# Altium PCB Main_2022-10-17.pcbdoc (part 2 of 2)
Units mil, origin at the board's own origin, x right, y up, seen from the top; angles counter-clockwise.
Board outline 1653.5 x 1653.5 mil, 4 copper layers (Top Layer, Mid-Layer 1, Mid-Layer 2, Bottom Layer); 65 components, 57 nets, 222 pads, 194 vias.
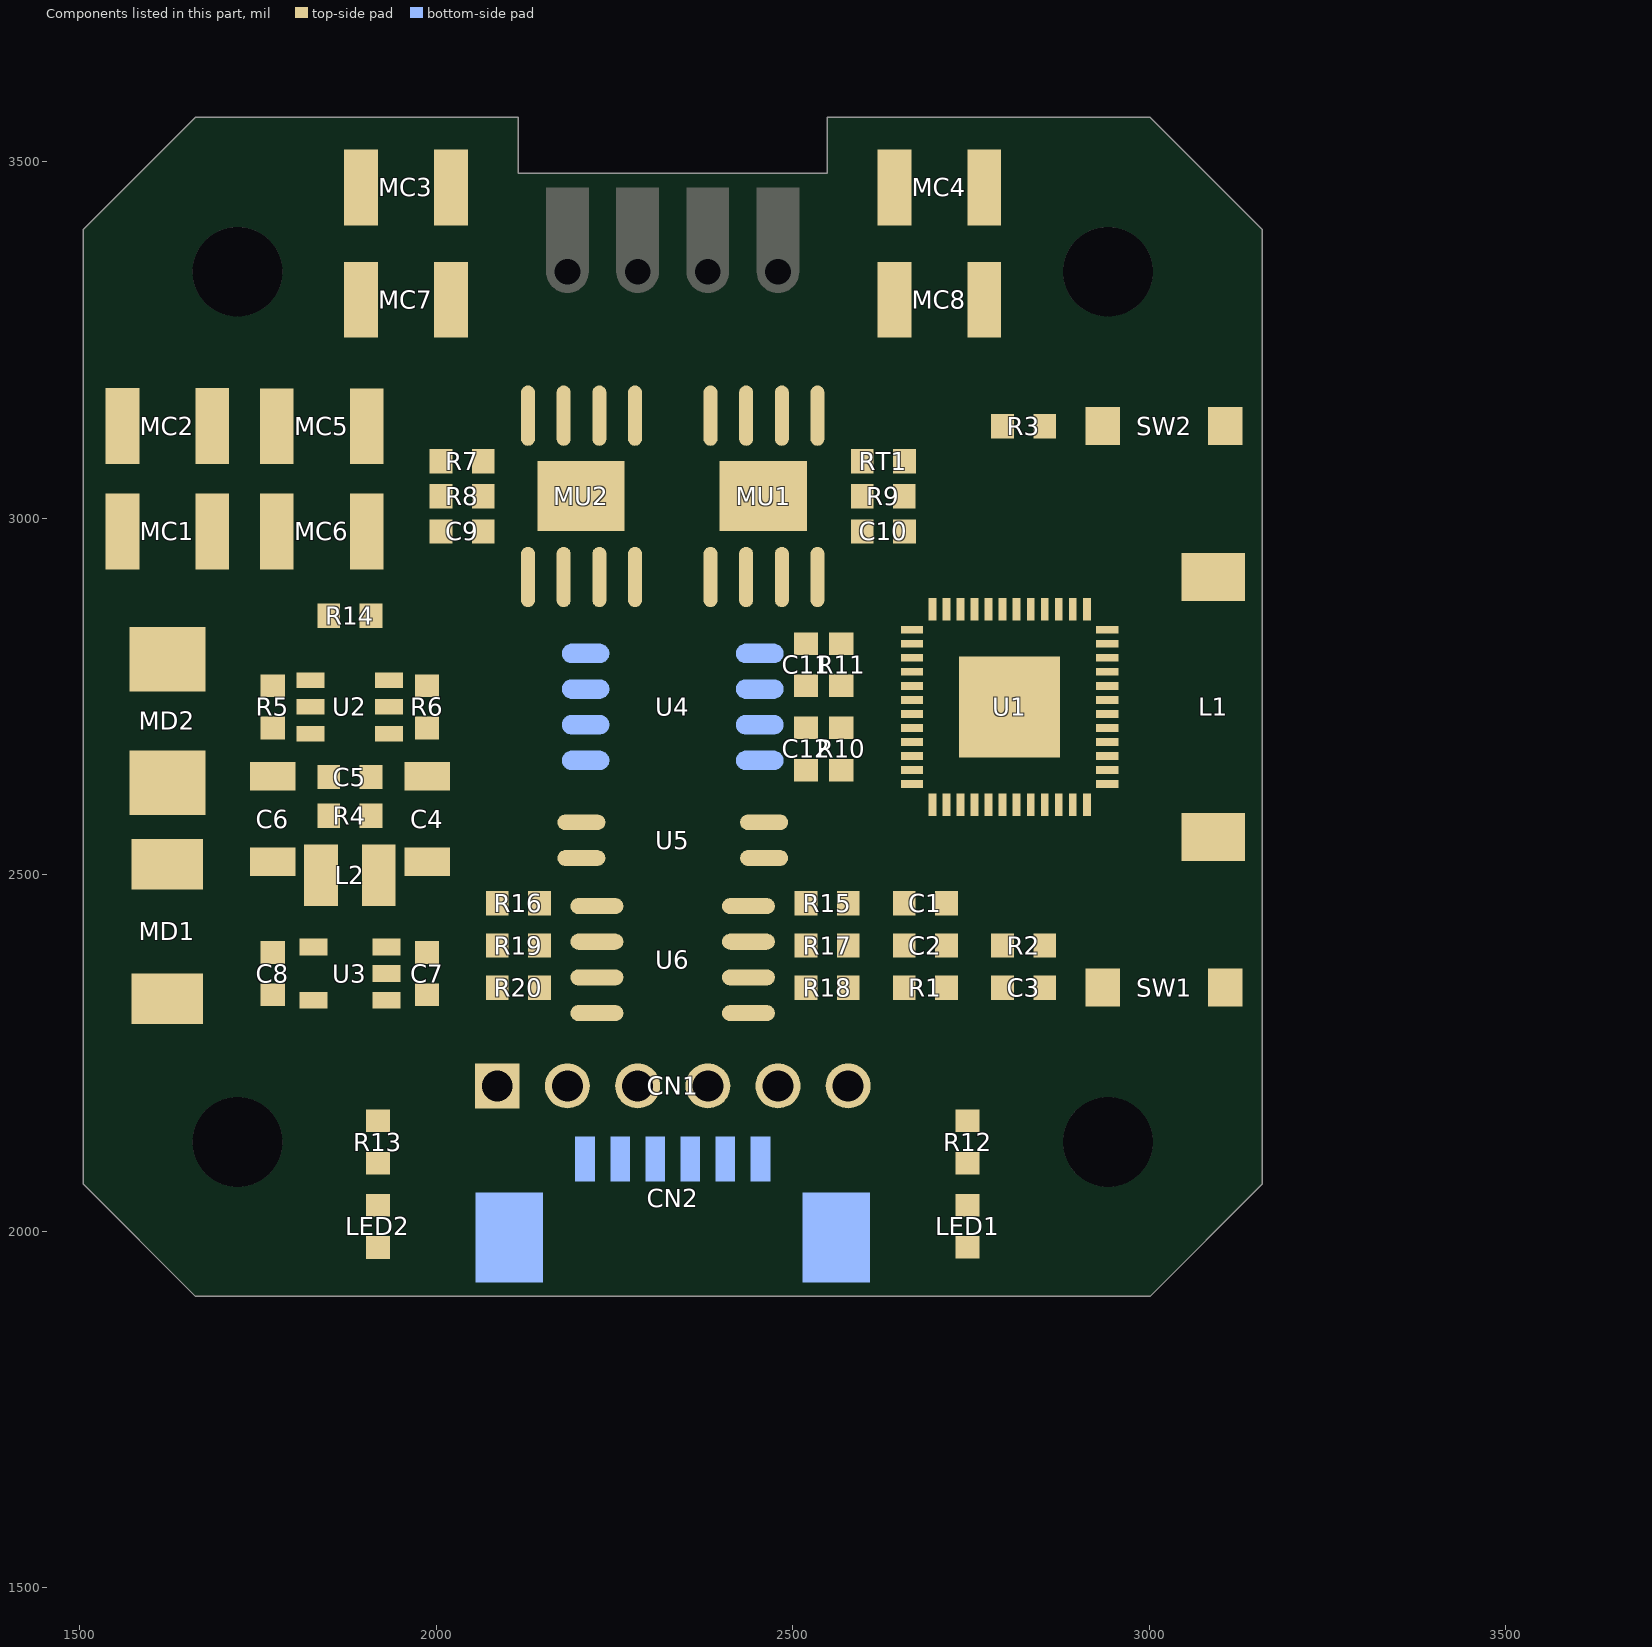
[diagram p4: the components of this part, seen from the top]

## Other copper
Top Layer:
  pour cut-out net L1_2: 3237.26,3011.09 3197.89,3011.09 3197.89,3089.83 3001.04,3089.83 3001.04,2381.17 3197.89,2381.17 3197.89,2971.72 3237.26,2971.72
  region net OUT4: 2464.62,3104.59 2469.54,3099.67 2499.07,3099.67 2503.99,3104.59 2503.99,3203.02 2489.23,3217.78 2489.23,3306.37 2508.91,3326.05 2508.91,3385.11 2449.86,3385.11 2449.86,3380.18 2449.86,3326.05 2449.86,3207.94 2464.62,3193.18
  region net MR1_2: 2454.78,3104.59 2449.86,3099.67 2420.33,3099.67 2415.41,3104.59 2415.41,3178.41 2376.04,3217.78 2376.04,3276.84 2380.96,3281.76 2415.41,3281.76 2420.33,3276.84 2420.33,3257.15 2420.33,3222.7 2454.78,3188.26
  region net OUT3: 2405.57,3104.59 2400.64,3099.67 2371.12,3099.67 2366.2,3104.59 2366.2,3139.04 2351.43,3153.81 2321.9,3188.26 2321.9,3301.45 2351.43,3330.97 2351.43,3385.11 2410.49,3385.11 2410.49,3330.97 2361.28,3281.76 2361.28,3217.78 2405.57,3173.49 2405.57,3143.97
  region net OUT2: 2243.16,3099.67 2248.09,3104.59 2248.09,3203.02 2233.32,3217.78 2233.32,3281.76 2248.09,3296.52 2277.61,3296.52 2312.06,3330.97 2312.06,3385.11 2253.01,3385.11 2253.01,3350.66 2193.95,3291.6 2193.95,3207.94 2208.72,3193.18 2208.72,3104.59 2213.64,3099.67
  region net MU2_7: 2198.89,3104.58 2193.97,3099.66 2164.44,3099.66 2159.52,3104.58 2159.52,3178.4 2120.15,3217.77 2120.15,3276.83 2125.07,3281.75 2159.52,3281.75 2164.44,3276.83 2164.44,3257.14 2164.44,3222.7 2198.89,3188.25
  region net OUT1: 2110.29,3104.59 2115.21,3099.67 2144.74,3099.67 2149.66,3104.59 2149.66,3173.49 2105.37,3217.78 2105.37,3281.76 2125.05,3301.45 2184.11,3301.45 2213.64,3330.97 2213.64,3385.11 2154.58,3385.11 2154.58,3355.58 2134.9,3335.89 2100.45,3335.89 2066,3301.45 2066,3183.34 2110.29,3139.04
  region net PGND: 2243.16,3276.84 2253.01,3286.68 2297.3,3286.68 2307.14,3276.84 2307.14,3217.78 2297.3,3207.94 2253.01,3207.94 2243.16,3217.78
  region net PGND: 2499.05,3276.84 2508.9,3286.68 2553.19,3286.68 2563.03,3276.84 2563.03,3217.78 2553.19,3207.94 2508.9,3207.94 2499.05,3217.78
  region net VM_IN: 1554.19,2292.59 1573.87,2272.9 1672.3,2272.9 1691.98,2292.59 1691.98,2381.17 1672.3,2400.85 1573.87,2400.85 1554.19,2381.17
  region net VM: 1691.98,2666.6 1672.3,2686.29 1573.87,2686.29 1554.19,2666.6 1554.2,2459.91 1573.88,2440.22 1672.31,2440.22 1691.99,2459.91
  region net VM: 1642.77,3198.1 1623.09,3178.41 1623.09,2932.35 1642.77,2912.66 1790.41,2912.66 1810.09,2932.35 1810.09,3178.41 1790.41,3198.1
  region net PGND: 1950.84,2932.35 1931.16,2912.66 1877.02,2912.66 1857.34,2932.35 1857.34,3178.41 1877.02,3198.1 1931.16,3198.1 1950.84,3178.41
  region net PGND: 1942.97,3257.15 1923.29,3237.47 1869.15,3237.47 1849.47,3257.15 1849.47,3503.21 1869.15,3522.9 1923.29,3522.9 1942.97,3503.21
  region net VM: 1962.65,3503.22 1982.34,3522.9 2036.47,3522.9 2056.16,3503.22 2056.16,3257.15 2036.47,3237.47 1982.34,3237.47 1962.65,3257.15
  region net PGND: 2710.68,3503.22 2730.37,3522.9 2784.5,3522.9 2804.19,3503.22 2804.19,3257.15 2784.5,3237.47 2730.37,3237.47 2710.68,3257.15
  region net VM: 2691,3257.15 2671.32,3237.47 2617.18,3237.47 2597.5,3257.15 2597.5,3503.21 2617.18,3522.9 2671.32,3522.9 2691,3503.21
  region net VM: 2321.9,3089.83 2302.22,3070.15 2282.53,3070.15 2277.61,3075.07 2277.61,3084.91 2262.85,3099.67 2262.85,3178.41 2272.69,3188.26 2302.22,3188.26 2321.9,3168.57
  region net VM: 2563.05,3075.07 2572.89,3084.91 2572.89,3114.44 2577.81,3119.36 2577.81,3178.41 2567.97,3188.26 2528.6,3188.26 2518.76,3178.41 2513.83,3173.49 2513.83,3099.67 2523.68,3089.83 2538.44,3075.07
  region net PGND: 1524.66,2745.34 1504.97,2765.03 1504.97,3178.41 1524.66,3198.1 1583.71,3198.1 1603.4,3178.41 1603.4,2917.59 1628.01,2892.98 1672.3,2892.98 1691.98,2873.3 1691.98,2765.03 1672.3,2745.34
  region net DIR-: 2546.36,2202.04 2579.82,2235.39 2549.65,2236.45 2545.4,2232.21
  region net CLK-: 2447.93,2202.05 2481.41,2235.39 2451.24,2236.46 2446.99,2232.23
  region net EN-: 2349.51,2202.06 2383,2235.39 2352.83,2236.47 2348.58,2232.24
  region net 3.3V: 2723.15,2318.83 2708.15,2318.93 2705.86,2325.95 2725.54,2325.82
  region net VM_IN: 1672.44,2375.61 1661.85,2386.23 1668.57,2389.4 1675.63,2382.32
  region net 3.3V_ESP: 2919.09,2693.77 2919.06,2678.77 2926.06,2681.26 2926.09,2691.26
  region net 3.3V_ESP: 2919.1,2674.08 2919.05,2659.08 2926.06,2661.56 2926.09,2671.56
  region net 3.3V_ESP: 2902.75,2647.58 2892.18,2636.94 2898.91,2633.78 2905.95,2640.87
  region net 3.3V_ESP: 2865.6,2620.64 2880.6,2620.64 2878.1,2613.64 2868.1,2613.64
  region net 3.3V_ESP: 2821.52,2620.6 2806.52,2620.63 2809,2613.63 2819,2613.6
  region net 3.3V_ESP: 2706.37,2627.08 2695.79,2637.72 2692.59,2631.01 2699.64,2623.92
  region net 3.3V_ESP: 2801.87,2850.35 2786.87,2850.41 2789.4,2857.4 2799.4,2857.36
  region net GND: 2742.8,2850.38 2727.8,2850.39 2730.3,2857.38 2740.3,2857.38
  region net GND: 2747.5,2850.37 2762.5,2850.37 2760,2857.37 2750,2857.37
  region net GND: 1925.88,1944.85 1910.88,1944.89 1913.4,1951.89 1923.4,1951.86
  region net ESP_UART0_RXD: 2317.12,2036.1 2306.49,2025.52 2314.62,2023.73 2318.87,2027.96
  region net ESP_UART0_TXD: 2267.61,2033 2254.24,2026.2 2261.28,2021.93 2266.91,2024.79
  region net GND: 2737.6,1944.87 2752.6,1944.87 2748.1,1951.87 2742.1,1951.87
  region net COM: 2285.78,2298.67 2285.76,2313.67 2278.76,2311.16 2278.77,2301.16
  region net COM: 2285.78,2448.67 2285.76,2463.67 2278.76,2461.16 2278.77,2451.16
  region net COM: 2285.79,2565.98 2285.74,2580.98 2278.75,2578.46 2278.78,2568.46
  region net 3.3V: 2610.59,2393.36 2610.59,2408.36 2603.59,2403.86 2603.59,2397.86
  region net 3.3V: 2610.59,2334.26 2610.59,2349.26 2603.59,2344.76 2603.59,2338.76
  region net 3.3V: 2610.59,2452.36 2610.59,2467.36 2603.59,2462.86 2603.59,2456.86
  region net 3.3V: 2377.75,2463.67 2377.72,2448.67 2384.73,2451.16 2384.74,2461.16
  region net GND: 2723.22,2482.81 2708.22,2482.84 2710.7,2475.83 2720.7,2475.81
  region net GND: 2801.87,2318.85 2786.87,2318.91 2789.4,2325.9 2799.4,2325.86
  region net 3.3V: 2801.87,2423.79 2786.87,2423.74 2789.4,2416.75 2799.4,2416.78
  region net ESP_RST: 2366.34,1967.17 2355.71,1977.76 2363.84,1979.54 2368.09,1975.31
  region net 3.3V: 2536.77,2654.44 2536.72,2639.44 2529.73,2641.96 2529.76,2651.96
  region net C11_2: 2550.07,2772.44 2549.88,2757.44 2556.91,2759.86 2557.03,2769.86
  region net C11_2: 2536.84,2757.44 2536.65,2772.44 2529.68,2769.86 2529.81,2759.86
  region net GND: 2469.68,2844.39 2459.07,2833.79 2465.78,2830.6 2472.86,2837.67
  region net GND: 2418,2837.16 2403,2837.15 2405.5,2830.15 2415.5,2830.16
  region net VM: 2014.3,3112.74 1999.3,3112.75 2001.8,3105.75 2011.8,3105.74
  region net GND: 2076.47,2863.59 2065.86,2852.99 2062.68,2859.71 2069.76,2866.77
  region net GND: 2069.24,2816.57 2069.21,2831.57 2062.22,2829.06 2062.23,2819.06
  region net PGND: 1856.97,2830.71 1841.97,2830.63 1844.43,2837.65 1854.43,2837.7
  region net GND: 2377.75,2313.67 2377.72,2298.67 2384.73,2301.16 2384.74,2311.16
  region net GND: 2377.76,2530.98 2377.71,2515.98 2384.72,2518.46 2384.75,2528.46
  region net 3.3V: 2723.11,2938.97 2708.11,2938.96 2710.6,2945.96 2720.6,2945.97
  region net GND: 2664.07,2938.94 2649.07,2938.99 2651.6,2945.98 2661.6,2945.94
  region net GND: 3114.27,2309.01 3099.27,2309.07 3101.8,2316.06 3111.8,2316.02
  region net MOSI: 2171.07,2667.98 2171.02,2652.98 2178.04,2657.46 2178.05,2663.46
  region net MISO: 2157.84,2702.98 2157.8,2717.98 2150.81,2713.46 2150.83,2707.46
  region net SCK: 2171.22,2767.84 2170.87,2752.85 2177.97,2757.18 2178.11,2763.18
  region net GND: 2136.31,2870.07 2121.31,2870.06 2123.8,2877.06 2133.8,2877.06
  region net DAC2: 2527.2,2870.06 2542.2,2870.06 2537.7,2877.06 2531.7,2877.06
  region net IN4: 2477.2,2870.06 2492.2,2870.06 2487.7,2877.06 2481.7,2877.06
  region net IN3: 2427.2,2870.06 2442.2,2870.06 2437.7,2877.06 2431.7,2877.06
  region net GND: 2377.2,2870.06 2392.2,2870.06 2387.7,2877.06 2381.7,2877.06
  region net DAC1: 2286.31,2870.07 2271.31,2870.06 2275.8,2877.06 2281.8,2877.06
  region net IN2: 2236.31,2870.07 2221.31,2870.06 2225.8,2877.06 2231.8,2877.06
  region net IN1: 2186.31,2870.07 2171.31,2870.06 2175.8,2877.06 2181.8,2877.06
  region net DAC2: 2880.6,2896.21 2865.6,2896.2 2870.1,2889.2 2876.1,2889.2
  region net DAC1: 2900.29,2925.75 2885.29,2925.72 2889.8,2918.73 2895.8,2918.74
  region net IN2: 2742.8,2574.79 2727.8,2574.8 2732.3,2581.79 2738.3,2581.79
  region net IN1: 2801.87,2574.77 2786.87,2574.82 2791.4,2581.8 2797.4,2581.78
  region net IN4: 2623.81,2757.54 2623.78,2772.54 2630.79,2768.06 2630.8,2762.06
  region net IN3: 2643.54,2792.24 2643.49,2777.24 2650.5,2781.71 2650.52,2787.71
  region net VBUS_S: 2899.39,2713.46 2899.38,2698.46 2906.38,2702.96 2906.39,2708.96
  region net FET_TEMP: 2919.09,2757.54 2919.06,2772.54 2926.07,2768.06 2926.08,2762.06
  region net ESP_RST: 2964.91,2777.24 2964.86,2792.24 2957.87,2787.71 2957.89,2781.71
  region net ESP_RST: 2860.92,2423.77 2845.92,2423.72 2850.45,2416.73 2856.45,2416.75
  region net FET_TEMP: 2590,2919.27 2605,2919.27 2600.5,2926.27 2594.5,2926.27
  region net ENIN: 2821.52,2830.71 2806.52,2830.67 2811,2837.68 2817,2837.7
  region net DIRIN: 2841.21,2850.39 2826.21,2850.37 2830.7,2857.38 2836.7,2857.38
  region net CLKIN: 2845.9,2830.67 2860.9,2830.67 2856.4,2837.67 2850.4,2837.67
  region net VBUS_S: 2073.51,2938.96 2058.51,2938.99 2063.03,2945.98 2069.03,2945.97
  region net GND: 2988.88,2909.41 2973.88,2909.45 2976.4,2916.45 2986.4,2916.42
  region net LED: 2752.61,2177.69 2737.62,2177.72 2742.11,2170.71 2748.09,2170.7
  region net ENIN: 2512.35,2580.77 2511.95,2565.77 2505.07,2570.46 2505.23,2576.45
  region net ENIN: 2526.18,2566.4 2511.18,2566.57 2515.61,2559.52 2521.59,2559.45
  region net DIRIN: 2575.2,2566.44 2590.2,2566.44 2585.69,2559.44 2579.71,2559.44
  region net CLKIN: 2377.76,2398.3 2377.67,2413.3 2384.7,2408.83 2384.73,2402.85
  region net DIRIN: 2377.76,2364.02 2377.67,2349.02 2384.7,2353.48 2384.73,2359.47
  region net DIRIN: 2590.22,2505.91 2575.22,2505.87 2579.71,2512.88 2585.69,2512.9
  region net CLKIN: 2604.8,2566.44 2619.8,2566.44 2615.29,2559.44 2609.31,2559.44
  region net CLKIN: 2619.78,2505.87 2604.78,2505.91 2609.31,2512.9 2615.29,2512.88
  region net ESP_BOOT: 2745.73,2922.38 2735.12,2932.98 2733.35,2924.85 2737.59,2920.61
  region net ESP_BOOT: 2737.6,2938.97 2752.6,2938.97 2748.1,2945.97 2742.1,2945.97
  region net LED: 2706.39,2676.58 2695.79,2665.97 2694.02,2674.1 2698.25,2678.34
  region net CSQ: 2624.69,2728.89 2609.69,2728.87 2614.2,2721.88 2620.2,2721.89
  region net 3.3V_ESP: 2672.26,2442.95 2640.51,2442.95 2646.4,2412.95 2666.4,2412.95
  region net 3.3V_ESP: 2640.51,2476.96 2672.26,2476.96 2666.4,2506.96 2646.4,2506.96
  region net GND: 2728.2,2442.95 2703.2,2442.95 2710.7,2427.95 2720.7,2427.95
  region net GND: 2703.2,2476.96 2728.2,2476.96 2720.7,2489.46 2710.7,2489.46
  region net 3.3V_ESP: 2640.51,2417.87 2672.26,2417.87 2666.4,2447.87 2646.4,2447.87
  region net 3.3V_ESP: 2672.26,2383.85 2640.51,2383.85 2646.4,2353.85 2666.4,2353.85
  region net GND: 2703.2,2417.87 2728.2,2417.87 2720.7,2432.87 2710.7,2432.87
  region net GND: 2806.9,2324.75 2781.9,2324.75 2789.4,2312.26 2799.4,2312.26
  region net ESP_RST: 2846,2358.77 2861,2358.77 2856.5,2367.77 2850.5,2367.77
  region net ESP_RST: 2869.37,2349.26 2869.37,2334.26 2878.37,2338.76 2878.37,2344.76
  region net GND: 2019.29,2658.06 2019.29,2618.06 2036.3,2627.06 2036.5,2647.06
  region net GND: 1974.8,2658.06 1999.8,2658.06 1992.3,2673.06 1982.3,2673.06
  region net 5V: 1955.29,2499.31 1955.29,2536.81 1938.2,2525.56 1938.2,2510.56
  region net 5V: 2006.05,2498.06 1968.55,2498.06 1979.8,2475.56 1994.8,2475.56
  region net U2_6: 1833.51,2654.06 1865.26,2654.06 1856.8,2672.66 1841.8,2672.66
  region net U2_6: 1856.83,2620.05 1833.51,2649.41 1825.26,2623.62 1834.65,2611.8
  region net U2_1: 1896.1,2654.06 1921.1,2654.06 1913.6,2669.06 1903.6,2669.06
  region net GND: 1994.3,2998.57 2019.3,2998.57 2011.8,3013.57 2001.8,3013.57
  region net GND: 2019.3,2964.55 1994.3,2964.55 2001.8,2949.55 2011.8,2949.55
  region net VBUS_S: 2073.57,2964.55 2058.57,2964.55 2063.05,2955.55 2069.05,2955.55
  region net VBUS_S: 2053.6,2998.57 2078.6,2998.57 2071.1,3013.57 2061.1,3013.57
  region net GND: 2644.1,2998.57 2669.1,2998.57 2661.6,3013.57 2651.6,3013.57
  region net GND: 2669.1,2964.55 2644.1,2964.55 2651.6,2949.55 2661.6,2949.55
  region net FET_TEMP: 2605,2964.55 2590,2964.55 2594.5,2955.55 2600.5,2955.55
  region net FET_TEMP: 2584.9,2998.57 2609.9,2998.57 2602.4,3013.57 2592.4,3013.57
  region net U2_6: 1814.9,2542.57 1844.64,2542.57 1820.71,2558.36 1804.8,2553.05
  region net 5V: 1943.1,2536.81 1943.1,2499.31 1965.6,2510.56 1965.6,2525.56
  region net 5V: 1900.75,2542.57 1938.25,2542.57 1927,2565.07 1912,2565.07
  region net R13_2: 1930.9,2052.66 1905.9,2052.66 1913.4,2067.66 1923.4,2067.66
  region net GND: 1930.9,1961.6 1905.9,1961.6 1913.4,1946.6 1923.4,1946.6
  region net 3.3V: 2731.63,2324.75 2699.88,2324.75 2705.86,2312.36 2725.54,2312.36
  region net 3.3V_ESP: 2640.57,2358.77 2672.32,2358.77 2666.4,2388.77 2646.4,2388.77
  region net 3.3V: 2781.9,2417.87 2806.9,2417.87 2799.4,2430.36 2789.4,2430.36
  region net ESP_RST: 2845.94,2417.87 2860.94,2417.87 2856.41,2426.87 2850.41,2426.87
  region net ESP_RST: 2861,2383.85 2846,2383.85 2850.5,2374.85 2856.5,2374.85
  region net 3.3V: 2778.37,3116.66 2778.37,3141.66 2763.37,3134.16 2763.37,3124.16
  region net ESP_BOOT: 2869.43,3136.66 2869.43,3121.66 2878.43,3126.16 2878.43,3132.16
  region net ESP_BOOT: 2845.04,3112.15 2837.68,3125.22 2833.82,3113.72 2836.88,3108.29
  region net U2_3: 1850.55,2599.96 1865.22,2579.72 1870.91,2597.44 1864.97,2605.63
  region net VM_IN: 1783.2,2689.93 1758.2,2689.93 1765.7,2674.93 1775.7,2674.93
  region net VM_IN: 1767.44,2721.68 1787.71,2707.04 1793.41,2721.43 1785.19,2727.36
  region net U2_4: 1787.71,2777.66 1787.71,2752.66 1802.71,2760.16 1802.71,2770.16
  region net U2_3: 1970.29,2752.66 1970.29,2777.66 1955.29,2770.16 1955.29,2760.16
  region net GND: 1999.8,2689.93 1974.8,2689.93 1982.3,2674.93 1992.3,2674.93
  region net GND: 1970.29,2707.05 1990.57,2721.68 1972.81,2727.36 1964.59,2721.43
  region net VM: 1994.3,3096.96 2019.3,3096.96 2011.8,3111.96 2001.8,3111.96
  region net VBUS_S: 2078.6,3062.95 2053.6,3062.95 2061.1,3047.95 2071.1,3047.95
  region net VBUS_S: 2053.6,3047.77 2078.6,3047.77 2071.1,3062.77 2061.1,3062.77
  region net VBUS_S: 2078.6,3013.75 2053.6,3013.75 2061.1,2998.75 2071.1,2998.75
  region net GND: 2019.3,3013.75 1994.3,3013.75 2001.8,2998.75 2011.8,2998.75
  region net FET_TEMP: 2584.9,3047.77 2609.9,3047.77 2602.4,3062.77 2592.4,3062.77
  region net FET_TEMP: 2609.9,3013.75 2584.9,3013.75 2592.4,2998.75 2602.4,2998.75
  region net GND: 2669.1,3013.75 2644.1,3013.75 2651.6,2998.75 2661.6,2998.75
  region net PGND: 1861.89,2846.45 1836.89,2846.45 1844.46,2831.45 1854.46,2831.45
  region net GND: 1924.53,2866.59 1909.72,2846.45 1924.18,2840.8 1930.18,2848.95
  region net 3.3V: 2593.83,2467.36 2593.83,2452.36 2602.83,2456.86 2602.83,2462.86
  region net ENIN: 2511.12,2476.96 2526.08,2476.96 2521.59,2485.94 2515.61,2485.94
  region net R16_1: 2137.4,2476.96 2152.4,2476.96 2147.9,2485.96 2141.9,2485.96
  region net EN-: 2077.62,2442.95 2069.67,2455.66 2066.02,2444.52 2069.29,2439.3
  region net 3.3V: 2593.83,2408.36 2593.83,2393.36 2602.83,2397.86 2602.83,2403.86
  region net CLKIN: 2502.77,2398.66 2502.77,2413.66 2493.77,2409.16 2493.77,2403.16
  region net 3.3V: 2593.83,2349.26 2593.83,2334.26 2602.83,2338.76 2602.83,2344.76
  region net U6_2: 2160.73,2413.66 2160.73,2398.66 2169.73,2403.16 2169.73,2409.16
  region net CLK-: 2069.67,2393.36 2069.67,2408.36 2067.1,2403.86 2067.1,2397.86
  region net DIR-: 2093.1,2324.75 2078.1,2324.75 2082.6,2315.75 2088.6,2315.75
  region net 3.3V_ESP: 2925.36,2621.67 2925.36,2632.7 2912.5,2632.26 2912.5,2622.26
  region net U1_2: 2956.85,2652.39 2956.85,2641.36 2971.5,2641.96 2971.5,2651.96
  region net 3.3V_ESP: 2925.36,2661.04 2925.36,2672.07 2912.5,2671.56 2912.5,2661.56
  region net 3.3V_ESP: 2925.36,2680.73 2925.36,2691.76 2912.5,2691.26 2912.5,2681.26
  region net VBUS_S: 2925.36,2700.41 2925.36,2711.44 2916.36,2708.96 2916.36,2702.96
  region net FET_TEMP: 2925.36,2759.47 2925.36,2770.5 2916.36,2768.06 2916.36,2762.06
  region net ESP_RST: 2956.85,2790.18 2956.85,2779.15 2965.85,2781.74 2965.85,2787.74
  region net DAC1: 2887.27,2888.11 2898.29,2888.11 2895.8,2897.11 2889.8,2897.11
  region net DAC2: 2867.59,2888.11 2878.61,2888.11 2876.1,2897.11 2870.1,2897.11
  region net CLKIN: 2858.92,2856.62 2847.9,2856.62 2850.4,2847.62 2856.4,2847.62
  region net DIRIN: 2839.24,2856.62 2828.22,2856.62 2830.7,2847.62 2836.7,2847.62
  region net ENIN: 2819.55,2856.62 2808.53,2856.62 2811,2847.62 2817,2847.62
  region net 3.3V_ESP: 2799.87,2856.62 2788.85,2856.62 2789.4,2843.76 2799.4,2843.76
  region net GND: 2760.5,2856.62 2749.48,2856.62 2750,2843.76 2760,2843.76
  region net GND: 2740.81,2856.62 2729.79,2856.62 2730.3,2843.76 2740.3,2843.76
  region net ESP_BOOT: 2710.11,2888.11 2721.13,2888.11 2718.6,2897.11 2712.6,2897.11
  region net LED: 2701.44,2856.62 2690.42,2856.62 2692.91,2847.64 2698.89,2847.64
  region net IN3: 2651.55,2779.15 2651.55,2790.18 2642.55,2787.74 2642.55,2781.74
  region net IN4: 2651.55,2759.47 2651.55,2770.5 2642.55,2768.06 2642.55,2762.06
  region net CSQ: 2651.55,2661.04 2651.55,2672.07 2642.55,2669.56 2642.55,2663.56
  region net SCK: 2651.55,2641.36 2651.55,2652.39 2642.55,2649.96 2642.55,2643.96
  region net MOSI: 2651.55,2621.67 2651.55,2632.7 2642.55,2630.26 2642.55,2624.26
  region net 3.3V_ESP: 2690.42,2614.3 2701.44,2614.3 2700.9,2627.26 2690.9,2627.26
  region net MISO: 2721.13,2582.8 2710.11,2582.8 2712.6,2573.8 2718.6,2573.8
  region net IN2: 2740.81,2582.8 2729.79,2582.8 2732.3,2573.8 2738.3,2573.8
  region net ESP_UART0_RXD: 2760.5,2582.8 2749.48,2582.8 2752,2573.8 2758,2573.8
  region net ESP_UART0_TXD: 2780.18,2582.8 2769.16,2582.8 2771.7,2573.8 2777.7,2573.8
  region net IN1: 2799.87,2582.8 2788.85,2582.8 2791.4,2573.8 2797.4,2573.8
  region net 3.3V_ESP: 2808.53,2614.3 2819.55,2614.3 2819,2627.26 2809,2627.26
  region net 3.3V_ESP: 2867.59,2614.3 2878.61,2614.3 2878.1,2627.26 2868.1,2627.26
  region net R12_2: 2752.6,2052.69 2737.6,2052.69 2742.1,2061.69 2748.1,2061.69
  region net GND: 2752.6,1961.63 2737.6,1961.63 2742.1,1952.63 2748.1,1952.63
  region net GND: 2535.76,2836.76 2535.76,2811.76 2550.76,2819.26 2550.76,2829.26
  region net GND: 2501.75,2811.76 2501.75,2836.76 2486.75,2829.26 2486.75,2819.26
  region net C11_2: 2535.76,2777.36 2535.76,2752.36 2550.76,2759.86 2550.76,2769.86
  region net GND: 2501.75,2693.56 2501.75,2718.56 2486.75,2711.06 2486.75,2701.06
  region net 3.3V: 2535.76,2659.46 2535.76,2634.46 2543.4,2641.96 2543.4,2651.96
  region net LED: 2737.62,2170.8 2752.58,2170.8 2748.09,2179.77 2742.11,2179.77
  region net R12_2: 2752.6,2079.73 2737.6,2079.73 2742.1,2070.73 2748.1,2070.73
  region net 3.3V: 1935.37,2167.46 1935.37,2142.46 1950.37,2149.96 1950.37,2159.96
  region net R13_2: 1930.9,2079.73 1905.9,2079.73 1913.4,2064.73 1923.4,2064.73
  region net FET_TEMP: 2609.9,3062.98 2584.9,3062.98 2592.4,3047.98 2602.4,3047.98
  region net 3.3V: 2672.55,3092.46 2672.55,3067.46 2687.55,3074.96 2687.55,3084.96
  region net U2_3: 1914.43,2762.07 1914.43,2783.73 1899.43,2777.86 1899.43,2767.86
  region net GND: 1953.79,2746.33 1953.79,2724.67 1957.6,2730.46 1957.6,2740.46
  region net U2_1: 1935.77,2687.27 1914.43,2687.27 1905.07,2676.2 1915.69,2672.66
  region net U2_6: 1843.55,2690.6 1806.2,2687.27 1839.56,2671.79 1854.6,2677.96
  region net VM_IN: 1804.18,2724.67 1804.18,2746.33 1800.4,2740.46 1800.4,2730.46
  region net 5V: 1910.49,2387.07 1910.49,2410.69 1896.7,2406.36 1896.7,2391.36
  region net 5V: 1949.86,2410.69 1949.86,2387.07 1972.36,2391.36 1972.36,2406.36
  region net GND: 1949.86,2373.3 1949.86,2349.67 1957.6,2351.46 1957.6,2371.46
  region net 5V: 1910.49,2312.27 1910.49,2335.9 1896.7,2331.56 1896.7,2316.56
  region net U1_2: 3044.98,2565.76 3044.98,2540.76 3029.98,2548.26 3029.98,2558.26
  region net GND: 3119.3,2315.03 3094.3,2315.03 3101.8,2302.46 3111.8,2302.46
  region net ESP_RST: 2927.2,2315.03 2942.2,2315.03 2937.7,2306.03 2931.7,2306.03
  region net ESP_RST: 2910.49,2349.26 2910.49,2334.26 2901.49,2338.76 2901.49,2344.76
  region net GND: 3082.53,3116.66 3082.53,3141.66 3067.53,3134.16 3067.53,3124.16
  region net ESP_BOOT: 2910.49,3136.66 2910.49,3121.66 2901.49,3126.16 2901.49,3132.16
  region net GND: 1795.7,2498.06 1745.7,2498.06 1760.7,2468.06 1780.7,2468.06
  region net VM_IN: 1758.2,2658.06 1783.2,2658.06 1775.7,2673.06 1765.7,2673.06
  region net VM_IN: 1751.6,2618.06 1738.69,2639.47 1732.5,2620.68 1737.82,2611.86
  region net GND: 2004.24,2315.93 1970.23,2315.93 1977.3,2302.46 1997.3,2302.46
  region net GND: 1970.23,2315.93 2004.24,2347.68 1973.35,2359.88 1958.72,2346.22
  region net 5V: 1970.23,2406.99 2004.24,2406.99 1994.8,2429.49 1979.8,2429.49
  region net 5V: 1970.23,2380.11 1970.23,2406.99 1947.73,2406.36 1947.73,2391.36
  region net GND: 1753.73,2375.24 1753.73,2406.99 1741.2,2401.06 1741.23,2381.06
  region net GND: 1753.73,2406.99 1787.74,2406.99 1780.7,2436.99 1760.7,2436.99
  region net 3.3V: 1787.74,2347.68 1787.74,2315.93 1817.74,2321.86 1817.74,2341.86
  region net 3.3V: 1787.74,2315.93 1753.73,2315.93 1760.7,2285.93 1780.7,2285.93
  region net C11_2: 2560.52,2721.99 2575.48,2721.99 2570.99,2730.96 2565.01,2730.96
  region net C11_2: 2550.99,2752.36 2550.99,2777.36 2535.99,2769.86 2535.99,2759.86
  region net C11_2: 2575.48,2749.03 2560.52,2749.03 2565.01,2740.05 2570.99,2740.05
  region net GND: 2550.99,2811.76 2550.99,2836.76 2535.99,2829.26 2535.99,2819.26
  region net COM: 2226.27,2584.55 2226.17,2562.5 2241.19,2568.46 2241.24,2578.46
  region net R16_1: 2172.89,2515.99 2172.83,2530.99 2163.85,2526.46 2163.88,2520.46
  region net ENIN: 2490.65,2580.97 2490.58,2566.01 2499.58,2570.46 2499.6,2576.45
  region net GND: 2437.29,2512.5 2437.19,2534.55 2422.22,2528.46 2422.26,2518.46
  region net COM: 2251.31,2444.86 2251.31,2467.46 2266.31,2461.16 2266.31,2451.16
  region net U6_2: 2191.12,2398.66 2191.12,2413.66 2182.12,2409.16 2182.12,2403.16
  region net U6_3: 2191.12,2348.66 2191.12,2363.66 2182.12,2359.16 2182.12,2353.16
  region net COM: 2251.31,2294.86 2251.31,2317.46 2266.31,2311.16 2266.31,2301.16
  region net 3.3V: 2412.09,2444.86 2412.09,2467.46 2397.09,2461.16 2397.09,2451.16
  region net CLKIN: 2472.28,2398.66 2472.28,2413.66 2481.28,2409.16 2481.28,2403.16
  region net CLKIN: 2403.74,2398.55 2403.52,2413.51 2394.61,2408.89 2394.7,2402.91
  region net DIRIN: 2472.28,2348.66 2472.28,2363.66 2481.28,2359.16 2481.28,2353.16
  region net DIRIN: 2403.74,2363.76 2403.52,2348.8 2394.61,2353.42 2394.7,2359.41
  region net GND: 2412.09,2294.86 2412.09,2317.46 2397.09,2311.16 2397.09,2301.16
  region net GND: 2392.2,2878.74 2377.2,2878.74 2381.7,2869.74 2387.7,2869.74
  region net IN3: 2442.2,2878.74 2427.2,2878.74 2431.7,2869.74 2437.7,2869.74
  region net IN4: 2492.2,2878.74 2477.2,2878.74 2481.7,2869.74 2487.7,2869.74
  region net DAC2: 2542.2,2878.74 2527.2,2878.74 2531.7,2869.74 2537.7,2869.74
  region net GND: 2138.65,2885.1 2118.97,2885.11 2123.8,2870.11 2133.8,2870.1
  region net IN1: 2186.31,2878.73 2171.31,2878.74 2175.8,2869.73 2181.8,2869.73
  region net IN2: 2236.31,2878.73 2221.31,2878.74 2225.8,2869.73 2231.8,2869.73
  region net DAC1: 2286.31,2878.73 2271.31,2878.74 2275.8,2869.73 2281.8,2869.73
Mid-Layer 1:
  pour cut-out: 3001.04,3089.83 3197.89,3089.83 3237.26,3089.83 3237.26,3050.46 3197.89,3050.46 3197.89,2381.17 3001.04,2381.17
  region net 3.3V: 2716.24,2922.37 2705.63,2932.98 2702.45,2926.26 2709.52,2919.19
Mid-Layer 2:
  pour cut-out: 3237.26,3050.46 3197.89,3050.46 3197.89,3089.83 3001.04,3089.83 3001.04,2381.17 3158.52,2381.17 3197.89,2381.17 3197.89,3011.09 3237.26,3011.09
Bottom Layer:
  pour cut-out: 3237.26,2971.72 3197.89,2971.72 3197.89,3089.83 3001.04,3089.83 3001.04,2381.17 3197.89,2381.17 3197.89,2932.35 3237.26,2932.35
  region net COM: 2264.32,2229.66 2310.3,2218.8 2297.38,2244.51 2287.38,2246.87
  region net ESP_UART0_RXD: 2314.62,2042.13 2299.62,2042.09 2304.1,2049.1 2310.1,2049.12
  region net ESP_UART0_TXD: 2265.42,2042.13 2250.42,2042.1 2254.9,2049.11 2260.9,2049.12
  region net COM: 2299.88,2312.79 2284.88,2312.79 2287.38,2319.79 2297.38,2319.79
  region net COM: 2299.88,2299.56 2284.88,2299.56 2287.38,2292.56 2297.38,2292.56
  region net COM: 2299.88,2462.79 2284.88,2462.79 2287.38,2469.79 2297.38,2469.79
  region net COM: 2299.88,2449.56 2284.88,2449.56 2287.38,2442.56 2297.38,2442.56
  region net COM: 2299.88,2566.88 2284.88,2566.88 2287.38,2559.88 2297.38,2559.88
  region net GND: 2109.9,2069.43 2094.9,2069.44 2097.4,2062.44 2107.4,2062.43
  region net GND: 2568.6,2069.44 2553.6,2069.43 2556.1,2062.43 2566.1,2062.44
  region net GND: 2462.29,2053.12 2447.29,2053.14 2449.8,2060.14 2459.8,2060.12
  region net 3.3V: 2216.21,2043.3 2201.21,2043.28 2203.7,2050.28 2213.7,2050.3
  region net ESP_RST: 2363.88,1974.37 2348.88,1974.41 2353.4,1981.4 2359.4,1981.38
  region net 3.3V: 2543.99,2656.9 2533.38,2646.3 2530.2,2653.02 2537.27,2660.08
  region net C11_2: 2539.64,2755.74 2534.61,2769.87 2528.75,2765.46 2532.31,2755.46
  region net MOSI: 2171.07,2667.98 2171.02,2652.98 2178.04,2657.46 2178.05,2663.46
  region net MISO: 2171.07,2717.98 2171.02,2702.98 2178.04,2707.46 2178.05,2713.46
  region net SCK: 2171.07,2767.98 2171.02,2752.98 2178.04,2757.46 2178.05,2763.46
  region net GND: 2171.07,2817.98 2171.02,2802.98 2178.03,2805.46 2178.06,2815.46
  region net DAC2: 2541.32,2855.95 2541.31,2870.95 2548.31,2866.45 2548.31,2860.45
  region net IN4: 2477.2,2856.83 2492.2,2856.83 2487.7,2849.83 2481.7,2849.83
  region net IN3: 2444.68,2862.83 2434.07,2873.43 2442.2,2875.2 2446.44,2870.96
  region net DAC1: 2288.79,2862.82 2278.19,2873.43 2286.32,2875.19 2290.56,2870.95
  region net IN2: 2238.79,2864.07 2228.18,2853.47 2236.32,2851.7 2240.56,2855.94
  region net IN1: 2188.79,2864.07 2178.18,2853.47 2186.32,2851.7 2190.56,2855.94
  region net DAC2: 2873.72,2892.84 2863.11,2903.44 2861.34,2895.31 2865.58,2891.07
  region net DAC1: 2886.16,2939.85 2886.15,2924.85 2879.15,2929.36 2879.16,2935.36
  region net IN2: 2735.93,2558.2 2725.31,2568.79 2723.55,2560.65 2727.8,2556.42
  region net IN1: 2795.01,2558.2 2784.37,2568.77 2782.63,2560.63 2786.89,2556.4
  region net IN4: 2624.69,2771.63 2609.69,2771.65 2614.2,2778.64 2620.2,2778.64
  region net IN3: 2629.4,2791.37 2644.4,2791.37 2639.9,2798.37 2633.9,2798.37
  region net VBUS_S: 2902.75,2705.33 2892.15,2715.95 2900.28,2717.71 2904.52,2713.46
  region net FET_TEMP: 2919.98,2771.62 2904.98,2771.66 2909.5,2778.65 2915.5,2778.63
  region net ESP_RST: 2964,2778.14 2979,2778.14 2974.5,2771.14 2968.5,2771.14
  region net ESP_RST: 2845.9,2436.97 2860.9,2436.97 2856.4,2443.97 2850.4,2443.97
  region net FET_TEMP: 2607.48,2913.28 2596.87,2902.68 2605.01,2900.91 2609.25,2905.15
  region net ENIN: 2807.42,2816.57 2807.41,2831.57 2800.42,2827.07 2800.42,2821.09
  region net DIRIN: 2841.21,2837.14 2826.21,2837.16 2830.71,2830.16 2836.69,2830.15
  region net CLKIN: 2859.02,2815.78 2844.49,2819.52 2846.65,2811.73 2853.38,2810.01
  region net VBUS_S: 2072.62,2924.86 2072.62,2939.86 2079.62,2935.36 2079.62,2929.36
  region net LED: 2751.74,2176.82 2751.74,2191.82 2758.74,2187.31 2758.74,2181.32
  region net ENIN: 2525.4,2580.58 2525.35,2565.58 2532.37,2570.07 2532.38,2576.05
  region net DIRIN: 2575.2,2579.67 2590.2,2579.67 2585.69,2586.67 2579.71,2586.67
  region net CLKIN: 2364.49,2398.26 2364.49,2413.26 2357.49,2408.75 2357.49,2402.76
  region net DIRIN: 2377.72,2349.06 2377.72,2364.06 2384.72,2359.55 2384.72,2353.56
  region net DIRIN: 2575.23,2492.66 2590.23,2492.66 2585.72,2485.66 2579.74,2485.66
  region net CLKIN: 2604.8,2579.67 2619.8,2579.67 2615.29,2586.67 2609.31,2586.67
  region net CLKIN: 2612.88,2489.3 2602.28,2499.91 2600.52,2491.77 2604.75,2487.54
  region net ESP_BOOT: 2751.71,2924.86 2751.71,2939.86 2758.71,2935.35 2758.71,2929.37
  region net LED: 2712.38,2659.1 2712.38,2674.1 2719.38,2669.59 2719.38,2663.61
  region net CSQ: 2610.59,2727.98 2610.54,2742.98 2603.56,2738.46 2603.57,2732.46
  region net ESP_RST: 2348.9,2070.14 2363.9,2070.14 2359.4,2061.14 2353.4,2061.14
  region net ESP_BOOT: 2406.69,2133.16 2419.37,2125.21 2423,2133.53 2417.8,2136.79
  region net 3.3V: 2196.2,2070.04 2221.2,2070.04 2213.7,2055.04 2203.7,2055.04
  region net ESP_UART0_TXD: 2250.4,2070.04 2265.4,2070.04 2260.9,2061.04 2254.9,2061.04
  region net GND: 2573.6,2054.26 2548.6,2054.26 2556.1,2069.26 2566.1,2069.26
  region net GND: 2114.9,2054.36 2089.9,2054.36 2097.4,2069.36 2107.4,2069.36
  region net ESP_UART0_RXD: 2299.6,2070.09 2314.6,2070.09 2310.1,2061.09 2304.1,2061.09
  region net GND: 2442.3,2070.19 2467.3,2070.19 2459.8,2055.19 2449.8,2055.19
  region net CSQ: 2484.99,2802.96 2484.99,2817.96 2493.99,2813.46 2493.99,2807.46
  region net C11_2: 2479.23,2747.96 2479.23,2772.96 2494.23,2765.46 2494.23,2755.46
  region net 3.3V: 2479.23,2647.96 2479.23,2672.96 2494.23,2665.46 2494.23,2655.46
  region net GND: 2184.17,2797.96 2184.17,2822.96 2169.17,2815.46 2169.17,2805.46
  region net SCK: 2178.41,2752.96 2178.41,2767.96 2169.41,2763.46 2169.41,2757.46
  region net MISO: 2178.41,2702.96 2178.41,2717.96 2169.41,2713.46 2169.41,2707.46
  region net MOSI: 2178.41,2652.96 2178.41,2667.96 2169.41,2663.46 2169.41,2657.46

## Silkscreen, mask and mechanical layers (free items; w line width, h text height)
Top Overlay:
  circle w10: c1721.51,3345.74 r108.27
  circle w10: c2941.99,3345.74 r108.27
  circle w10: c2941.99,2125.26 r108.27
  circle w10: c1721.51,2125.26 r108.27
  region: 2961.67,2538.65 3001.04,2578.02 3001.04,2538.65
  region: 2686.08,2853.61 2725.45,2853.61 2725.45,2656.76 2686.08,2656.76
  region: 2686.08,2617.39 2686.08,2656.76 2882.93,2656.76 2882.93,2617.39
  region: 2922.29,2617.38 2882.92,2617.38 2882.92,2814.23 2922.29,2814.23
  region: 2922.3,2853.61 2922.3,2814.24 2725.45,2814.24 2725.45,2853.61
  lines w8: 2607.34,2538.65 2607.34,2932.35 3001.04,2932.35 3001.04,2538.65 2607.34,2538.65
  text "FLASH" at 2851.05,2981.59 h80
  text "ABI" at 2583.24,2854.11 h39.37 r90
  text "SPI" at 2582.74,2544.07 h39.37 r90
  text "RESET" at 2848.29,2430.42 h80
  text "PWR" at 1839.62,2077.71 h59.05 r270
  text "ERR" at 2784.5,2071.13 h59.05 r270
  text "Ver 2.0" at 2976.43,1923.49 h59.05 r45
Bottom Overlay:
  text "OUT1" at 2164.42,3114.32 h59.05 r270
  text "OUT2" at 2262.84,3114.32 h59.05 r270
  text "OUT3" at 2361.27,3114.32 h59.05 r270
  text "OUT4" at 2459.7,3114.32 h59.05 r270
  text "PWR+" at 2066,2263.06 h59.05 r270
  text "PWR-" at 2164.43,2263.06 h59.05 r270
  text "COM" at 2262.85,2263.06 h59.05 r270
  text "EN-" at 2361.28,2263.06 h59.05 r270
  text "CLK-" at 2459.7,2263.06 h59.05 r270
  text "DIR-" at 2558.13,2263.06 h59.05 r270
  text "3.3V" at 2627.02,1918.57 h39.37 r270
  text "TXD" at 2666.39,1918.57 h39.37 r270
  text "RXD" at 2705.76,1918.57 h39.37 r270
  text "RST" at 2745.13,1918.57 h39.37 r270
  text "BOOT" at 2784.5,1918.57 h39.37 r270
  text "GND" at 2823.87,1918.57 h39.37 r270
Mechanical 1:
  lines w10: 1576.7,2415.5 1576.75,3050.5 1576.7,3050.46 1901.7,3050.46 1901.7,2415.5 1576.7,2415.5
Document:
  lines w8: 2331.7,2263.06 2597.5,2263.06 2617.2,2282.76 2617.2,2489.46 2597.5,2509.16 2528.6,2509.16 2508.9,2528.86 2508.9,2597.66 2489.3,2617.36 2341.6,2617.36 2331.7,2617.36 ; 1721.51,2263.06 2036.47,2263.06 2036.47,2824.08 1721.51,2824.08 1721.51,2263.06